# Altium PCB AC_Measure.PcbDoc
Units mil, origin at the board's own origin, x right, y up, seen from the top; angles counter-clockwise.
Board outline 4448.82 x 2165.35 mil, 2 copper layers (Top Layer, Bottom Layer); 52 components, 41 nets, 289 pads, 28 vias.
Unrouted connection lines stored in the file: 5.
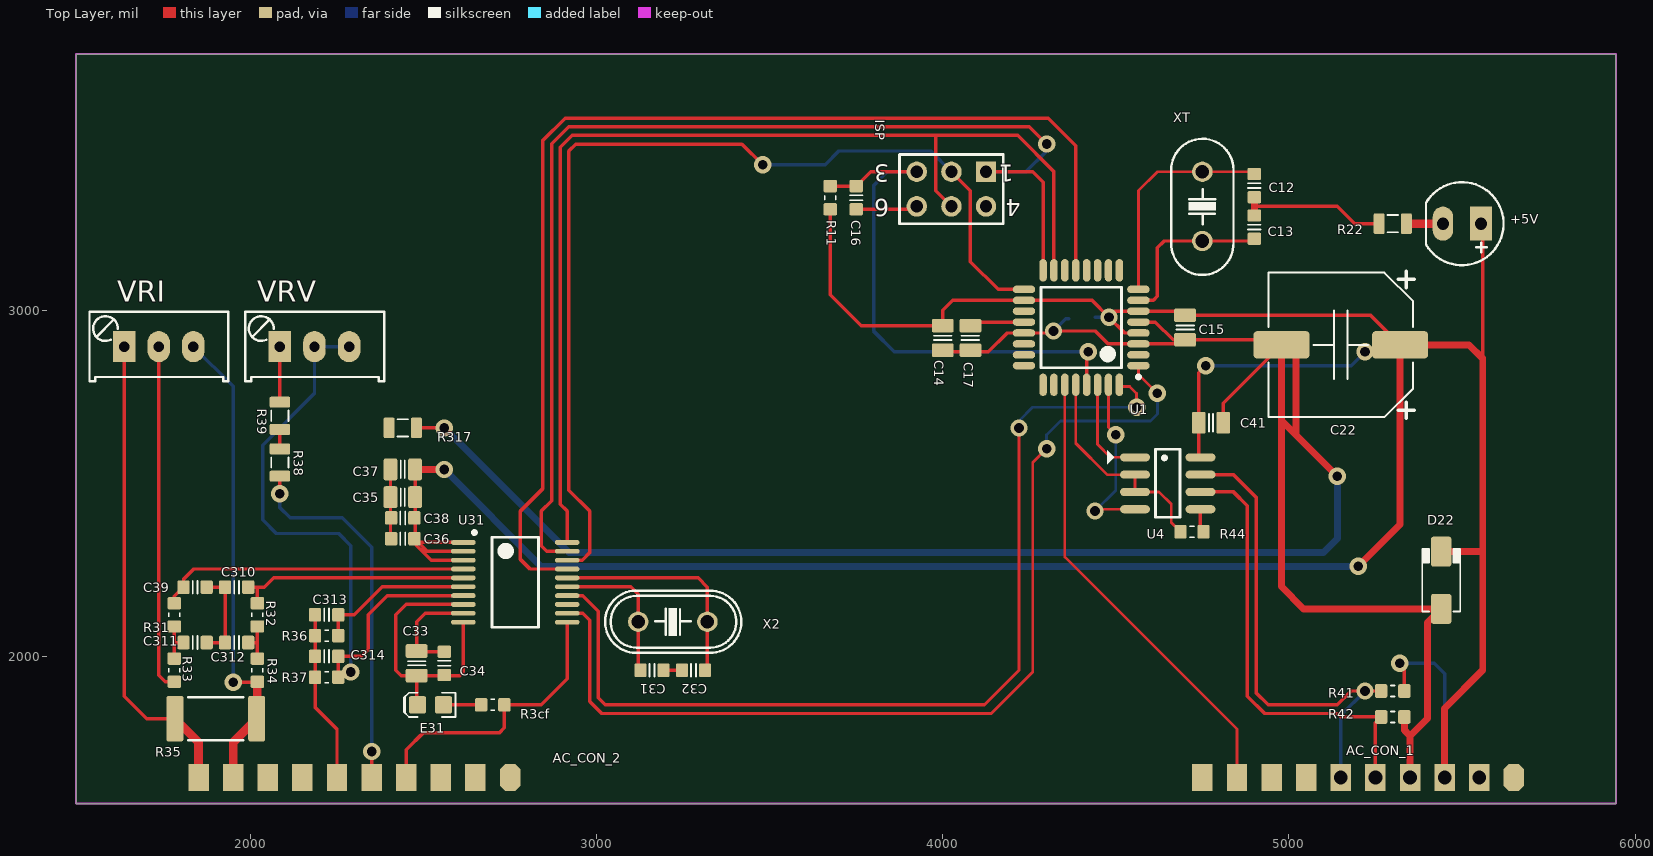
[diagram p0: Top Layer view]
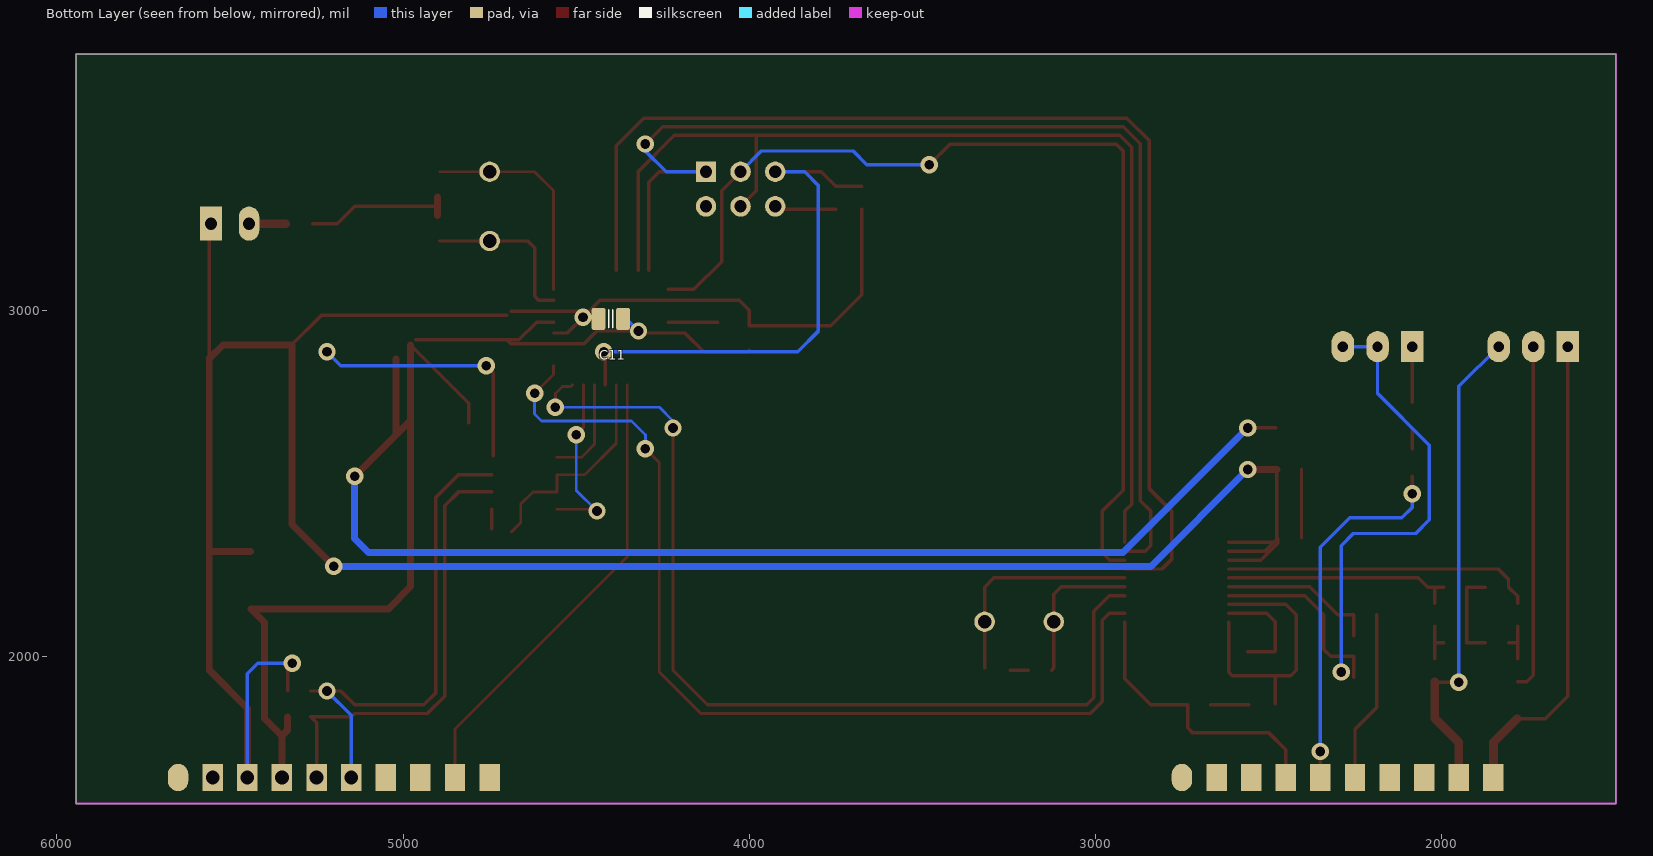
[diagram p1: Bottom Layer view, seen from below]
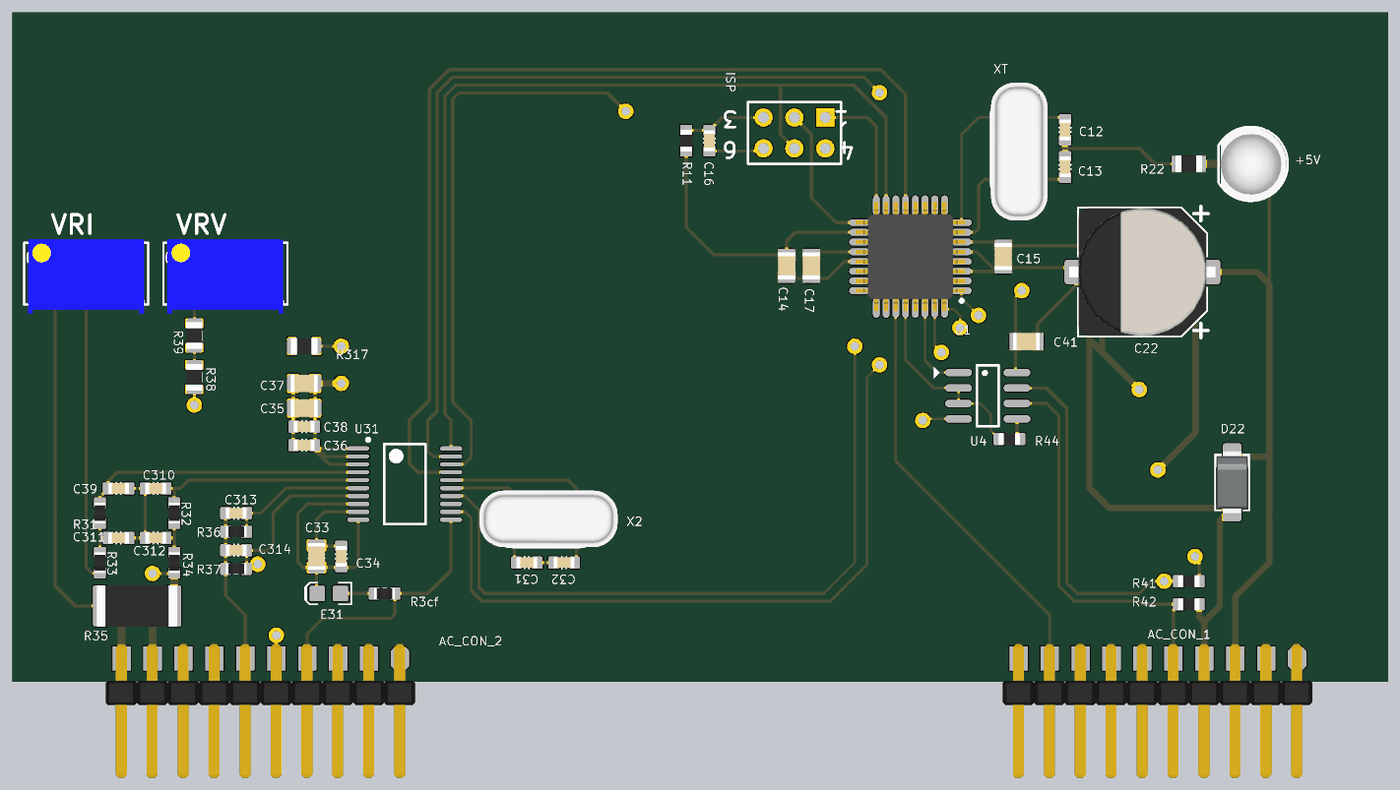
[diagram p2: 3D render of the assembled board from above, using the file's embedded part models]

## Layer stack, top to bottom
Top Solder: solder mask 0.4, Solder Resist, Dk 3.5
Top Layer: signal copper 1.4
Dielectric 1: dielectric 12.6, FR-4, Dk 4.8
Bottom Layer: signal copper 1.4
Bottom Solder: solder mask 0.4, Solder Resist, Dk 3.5

## Board outline
1496.06,1574.8 5944.88,1574.8 5944.88,3740.16 1496.06,3740.16

## Design rules (kind name [scope] priority, off if disabled: settings)
Clearance [All] p1: gap=10 except(8: Arc-SMDPad Track-SMDPad SMDPad-SMDPad; 20: Arc-Poly Track-Poly SMDPad-Poly THPad-Poly Via-Poly Fill-Poly Poly-Poly)
PlaneConnect [All] p1: planeconnectstyle=Direct reliefexpansion=20 reliefentries=4 reliefconductorwidth=10 reliefairgap=10
PolygonConnect [All] p1: connectstyle=Direct reliefconductorwidth=10 reliefentries=4 polygonreliefangle="90 Angle" airgapwidth=10
RoutingVias [All] p1: holewidth=31.5 width=47.24 viastyle="Through Hole" minholewidth=19.68 minwidth=43.31 maxholewidth=196.85 maxwidth=196.85
SolderMaskExpansion [All] p1: expansion=4
Width [All] p1: maxlimit=50 minlimit=8 preferedwidth=25
29 further rules are at their usual default settings.

## Components (designator, comment, footprint, x,y, rotation, side; value= is the part's Value field where it differs from the comment)
+5V "Led" "LED 5mm RED" 5500,3250 r180 top
AC_CON_1 "Header 10X2A" OMC10 5650,1650 r180 top
AC_CON_2 "Header 10X2A" OMC10 2750,1650 r180 top
C11 "Cap" CAPC2012N_F#1 4400,2975 r180 bottom
C12 "CAP NP" CAPC1608N 4900,3360 r270 top
C13 "CAP NP" CAPC1608N 4900,3240 r90 top
C14 "Cap" CAPC2012N_F#2 4000,2920 r270 top
C15 "Cap" CAPC2012N_F#2 4700,2950 r270 top
C16 "CAP NP" CAPC1608N 3750,3325 r90 top
C17 "Cap" CAPC2012N_F#2 4080,2920 r270 top
C22 "2200uF/35V" CAP_ELEC_SIZE_G 5150,2900 r90 top
C31 "CAP NP" CAPC1608N 3160,1960 r180 top
C32 "CAP NP" CAPC1608N 3280,1960 r0 top
C33 "Cap" CAPC2012N_F#3 2480,1980 r270 top
C34 "CAP NP" CAPC1608N 2560,1980 r90 top
C35 "Cap" CAPC2012N_F#3 2440,2460 r180 top
C36 "CAP NP" CAPC1608N 2440,2340 r0 top
C37 "Cap" CAPC2012N_F#3 2440,2540 r180 top
C38 "CAP NP" CAPC1608N 2440,2400 r0 top
C39 "CAP NP" CAPC1608N 1840,2200 r180 top
C41 "100nF/104" CAPC2012N_F#2 4775,2675 r180 top
C310 "CAP NP" CAPC1608N 1960,2200 r0 top
C311 "CAP NP" CAPC1608N 1840,2040 r180 top
C312 "CAP NP" CAPC1608N 1960,2040 r0 top
C313 "CAP NP" CAPC1608N 2220,2120 r0 top
C314 "CAP NP" CAPC1608N 2220,2000 r0 top
D22 "Diode" DO-214AC 5440,2220 r90 top
E31 "Blue" LED-0805-K 2520,1860 r180 top
ISP "Header 3X2A" HDR2X3_CEN 4125,3400 r180 top
R3cf "Res" 0603ESDA 2700,1860 r180 top
R11 "Res" RESC1608N_ZERO 3675,3325 r270 top
R22 "Res_0805_1k" RESC2012N_F#1 5300,3250 r180 top
R31 "Res" 0603ESDA 1780,2120 r90 top
R32 "Res" 0603ESDA 2020,2120 r90 top
R33 "Res" 0603ESDA 1780,1960 r90 top
R34 "Res" 0603ESDA 2020,1960 r90 top
R35 "0.002R" RESC6332N 1900,1820 r180 top
R36 "Res" 0603ESDA 2220,2060 r0 top
R37 "Res" 0603ESDA 2220,1940 r0 top
R38 "Res" RESC2012N_F#2 2085,2560 r90 top
R39 "Res" RESC2012N_F#2 2085,2695 r90 top
R41 "1k" RESC1608N_ZERO 5300,1900 r0 top
R42 "1k" RESC1608N_ZERO 5300,1825 r180 top
R44 "330R" RESC1608N_ZERO 4720,2360 r180 top
R317 "Res" RESC2012N_F#2 2440,2660 r180 top
U1 "ATmega88PA" 32PIN 4400,2950 r180 top
U4 "MAX485" SO-8 4650,2500 r0 top
U31 "ADE7753" TSSOP-20 2765,2214 r0 top
VRI "1K" VR1 1635,2895 r0 top
VRV "100K" VR1 2085,2895 r0 top
X2 "3.5795Mhz" XT2 3220,2100 r180 top
XT "16MHz" XT2 4750,3300 r90 top

## Footprints (in the part's own frame and the unit in brackets; to place one, negate y for a bottom-side part, rotate by r counter-clockwise, add the part's x,y. Pads: shape width x height; smd on the part's side, far side on the other; paste and mask are expansions set on the pad)
32PIN [mm]
  oval 1.65x0.55 smd: 1(-4.2,2.8) 2(-4.2,2) 3(-4.2,1.2) 4(-4.2,0.4) 5(-4.2,-0.4) 6(-4.2,-1.2) 7(-4.2,-2) 8(-4.2,-2.8) 17(4.2,-2.8) 18(4.2,-2) 19(4.2,-1.2) 20(4.2,-0.4) 21(4.2,0.4) 22(4.2,1.2) 23(4.2,2) 24(4.2,2.8)
  oval 0.55x1.65 smd: 9(-2.8,-4.2) 10(-2,-4.2) 11(-1.2,-4.2) 12(-0.4,-4.2) 13(0.4,-4.2) 14(1.2,-4.2) 15(2,-4.2) 16(2.8,-4.2) 25(2.8,4.2) 26(2,4.2) 27(1.2,4.2) 28(0.4,4.2) 29(-0.4,4.2) 30(-1.2,4.2) 31(-2,4.2) 32(-2.8,4.2)
  silkscreen extent -4.33,-2.95 2.95,3.75, body extent -4.5,-4.5 4.5,4.5, height 1.6
0603ESDA [mm] "Chip ESD suppressor, Body 1.6x0.8mm, 0603, IPC Medium Density"
  round 0.254 on Mech14: 0(0,0)
  rrect25% 0.9x1 smd: 1(-0.85,0) 2(0.85,0)
  Top Layer pour cut-out: -0.4,0.6 0.4,0.6 0.4,-0.6 -0.4,-0.6
  silkscreen extent -0.15,-0.41 0.15,0.41, body extent -0.85,-0.45 0.85,0.45, height 0.79
CAP_ELEC_SIZE_G [mm] "Capacitor, polarized, aluminum can; 10.0x10.2mm DxH"
  round 0.635 on Mech14: 0(0,0)
  rrect25% 2x4.1 smd: 1(0,-4.35) 2(0,4.35)
  silkscreen extent -5.4,-5.4 5.4,5.3, body extent -5.25,-6 5.25,6, height 10.5
CAPC1608N [mm] "Chip Capacitor, Body 1.6x0.8mm, 0603, IPC Medium Density"
  round 0.254 on Mech14: 0(0,0)
  rrect25% 0.9x1 smd: 1(-0.85,0) 2(0.85,0)
  Top Layer pour cut-out: -0.4,0.6 0.4,0.6 0.4,-0.6 -0.4,-0.6
  silkscreen extent -0.18,-0.48 0.18,0.48, body extent -0.85,-0.45 0.85,0.45, height 0.89
CAPC2012N_F#1 [mm] "Chip Capacitor, Body 2.0x1.2mm, 0805, IPC Medium Density, for Flex circuits"
  round 0.254 on Mech14: 0(0,0)
  rrect25% 1.2x1.4 on Bottom Solder: 1(-0.9,0) 1(0.9,0)
  rrect25% 1x1.6 smd paste-1: 1(-0.9,0) 2(0.9,0)
  rrect25% 1x1.4 on Bottom Paste: 1(-0.9,0) 1(0.9,0)
  Top Layer pour cut-out: -0.4,0.8 0.4,0.8 0.4,-0.8 -0.4,-0.8
  silkscreen extent -0.15,-0.65 0.15,0.65, body extent -1.1,-0.72 1.1,0.73, height 1.34
CAPC2012N_F#2 [mm] "Chip Capacitor, Body 2.0x1.2mm, 0805, IPC Medium Density, for Flex circuits"
  round 0.254 on Mech14: 0(0,0)
  rrect25% 1.2x1.4 on Top Solder: 1(-0.9,0) 1(0.9,0)
  rrect25% 1x1.6 smd paste-1: 1(-0.9,0) 2(0.9,0)
  rrect25% 1x1.4 on Top Paste: 1(-0.9,0) 1(0.9,0)
  Top Layer pour cut-out: -0.4,0.8 0.4,0.8 0.4,-0.8 -0.4,-0.8
  silkscreen extent -0.15,-0.65 0.15,0.65, body extent -1.1,-0.72 1.1,0.73, height 1.34
CAPC2012N_F#3 [mm] "Chip Capacitor, Body 2.0x1.2mm, 0805, IPC Medium Density, for Flex circuits"
  round 0.254 on Mech14: 0(0,0)
  rrect50% 1.2x1.4 on Top Solder: 1(-0.9,0) 1(0.9,0)
  rrect25% 1x1.6 smd paste-1: 1(-0.9,0) 2(0.9,0)
  rrect50% 1x1.4 on Top Paste: 1(-0.9,0) 1(0.9,0)
  Top Layer pour cut-out: -0.4,0.8 0.4,0.8 0.4,-0.8 -0.4,-0.8
  silkscreen extent -0.15,-0.65 0.15,0.65, body extent -1.1,-0.72 1.1,0.73, height 1.34
DO-214AC [mm] "JEDEC DO214 variation AC. SMA"
  round 0.508 on Mech14: 0(0,0)
  rrect25% 2.2x1.5 smd: A(-2.1,0) K(2.1,0)
  silkscreen extent -2.3,-1.4 2.3,1.4, body extent -2.6,-1.3 2.6,1.3, height 2.42
HDR2X3_CEN [mm] "Connector; Header; 3x2 Position"
  rect 1.5x1.5 hole 0.9: 1(0,0)
  round 1.5 hole 0.9: 2(2.54,0) 3(5.08,0) 4(0,2.54) 5(2.54,2.54) 6(5.08,2.54)
  silkscreen extent -1.27,-1.27 6.35,3.81
"LED 5mm RED" [mm]
  rect 1.6x2.5 hole 0.9: A(-1.397,0)
  oval 1.5x2.5 hole 0.9: K(1.397,0)
  silkscreen extent -3.04,-3.05 2.64,3.04, body extent -2.94,-2.97 2.48,3.05, height 12.31
LED-0805-K [mil]
  round 20 on Mech14: 0(0,0)
  rrect25% 50x50 smd: A(-37.5,0) K(37.5,0)
  Top Layer pour cut-out: -15,30 15,30 15,-30 -15,-30
  silkscreen extent -72,-35 77,35, body extent -39,-25 39,25, height 31
OMC10 [mm]
  oct 1.5x2 smd: 1(0,0)
  rect 1.5x2 smd: 2(2.54,0) 3(5.08,0) 4(7.62,0) 5(10.16,0) 6(12.7,0) 7(15.24,0) 8(17.78,0) 9(20.32,0) 10(22.86,0)
  oval 1.5x2 smd far side: 11(0,0)
  rect 1.5x2 smd far side: 12(2.54,0) 13(5.08,0) 14(7.62,0) 15(10.16,0) 16(12.7,0) 17(15.24,0) 18(17.78,0) 19(20.32,0) 20(22.86,0)
  body extent -1.24,-1.18 24.16,9.82, height 2.33
RESC1608N_ZERO [mm] "Chip Resistor, Body 1.6x0.8mm, 0603, IPC Medium Density"
  round 0.254 on Mech14: 0(0,0)
  rrect25% 0.9x1 smd: 1(-0.85,0) 2(0.85,0)
  Top Layer pour cut-out: -0.4,0.6 0.4,0.6 0.4,-0.6 -0.4,-0.6
  silkscreen extent -0.15,-0.41 0.15,0.41, body extent -0.87,-0.47 0.88,0.48, height 0.54
RESC2012N_F#1 [mm] "Chip Resistor, Body 2.0x1.2mm, 0805, IPC Medium Density"
  round 0.254 on Mech14: 0(0,0)
  rrect25% 1x1.3 on Top Solder: 1(-1,0) 1(1,0)
  rrect25% 0.8x1.5 smd paste-1: 1(-1,0) 2(1,0)
  rrect25% 0.8x1.3 on Top Paste: 1(-1,0) 1(1,0)
  Top Layer pour cut-out: -0.6,0.75 0.6,0.75 0.6,-0.75 -0.6,-0.75
  silkscreen extent -0.38,-0.64 0.38,0.64, body extent -1.1,-0.67 1.1,0.68, height 0.69
RESC2012N_F#2 [mm] "Chip Resistor, Body 2.0x1.2mm, 0805, IPC Medium Density"
  round 0.254 on Mech14: 0(0,0)
  rrect50% 1x1.3 on Top Solder: 1(-1,0) 1(1,0)
  rrect25% 0.8x1.5 smd paste-1: 1(-1,0) 2(1,0)
  rrect50% 0.8x1.3 on Top Paste: 1(-1,0) 1(1,0)
  Top Layer pour cut-out: -0.6,0.75 0.6,0.75 0.6,-0.75 -0.6,-0.75
  silkscreen extent -0.38,-0.64 0.38,0.64, body extent -1.1,-0.67 1.1,0.68, height 0.69
RESC6332N [mm] "Chip Resistor, Body 6.3x3.2mm, 2512, IPC Medium Density"
  round 1 on Mech14: 0(0,0)
  rrect25% 1.25x3.35 smd: 1(-3,0) 2(3,0)
  silkscreen extent -2,-1.58 2,1.58, body extent -3.3,-1.7 3.3,1.7, height 0.69
SO-8 [mm] "8-Pin Small Outline Integrated Circuit 1.27 mm Pitch, IPC Medium Density"
  oval 2.2x0.6 smd: 1(-2.4,1.905) 2(-2.4,0.635) 3(-2.4,-0.635) 4(-2.4,-1.905) 5(2.4,-1.905) 6(2.4,-0.635) 7(2.4,0.635) 8(2.4,1.905)
  silkscreen extent -4.44,-2.5 0.9,2.5, body extent -1.95,-2.45 1.95,2.45, height 1.75
TSSOP-20 [mm] "TSOP, 20-Leads, Body 6.5x4.4mm, Pitch 0.65mm, IPC Low Density"
  oval 1.8x0.35 smd: 1(-3.81,2.925) 2(-3.81,2.275) 3(-3.81,1.625) 4(-3.81,0.975) 5(-3.81,0.325) 6(-3.81,-0.325) 7(-3.81,-0.975) 8(-3.81,-1.625) 9(-3.81,-2.275) 10(-3.81,-2.925) 11(3.81,-2.925) 12(3.81,-2.275) 13(3.81,-1.625) 14(3.81,-0.975) 15(3.81,-0.325) 16(3.81,0.325) 17(3.81,0.975) 18(3.81,1.625) 19(3.81,2.275) 20(3.81,2.925)
  silkscreen extent -3.12,-3.3 1.7,3.77, body extent -2.25,-3.3 2.25,3.3, height 1.2
VR1 [mil] "Variable Resistor"
  rect 65x90 hole 30: 1(0,0)
  oval 65x90 hole 30: 2(100,0) 3(200,0)
  silkscreen extent -100,-100 301,100, body extent -88,-130 288,110, height 455
XT2 [mm] "Footpin for Crystal 2 pin"
  round 1.5 hole 1: 1(-2.54,0) 2(2.54,0)
  silkscreen extent -5.03,-2.29 4.96,2.29, body extent -5.93,-2.36 5.42,2.29, height 3.5

## Part data
AC_CON_1 AC_CON_2: "Header, 10-Pin, Dual row"
C22: library part CP4, "Cap 1000uF/16V - 220uF/50V"
C41: library part "CAP NP"
E31: library part LED_SMD_Blue_0805_100mcd, "LED 0805 SMD Blue 100mcd 470nm"
ISP: "Header, 3-Pin, Dual row"
R22: library part Res
R35: library part R, "Resistor 1/4W"
R41 R42 R44: library part Res, "Tro dan"
U1: library part ATmega48/168/328, "ATmega48/168/328"
U4: "RS232 - RS485 (Same sn75176)"
U31: "Single-Phase Multifunction Metering IC with di/dt Sensor Interface"
VRI VRV: library part VR, "Var Resistor"
X2: library part XT2, "Crystal For all Crystal 2pin."
XT: library part Crystal

## Via types
v1: diameter 50, hole 28, Top Layer to Bottom Layer, 23 vias
v2: diameter 59.06, hole 39.37, Top Layer to Bottom Layer, 5 vias

## Nets (pads, with @x,y where several pads share a name; then routed paths per layer and width w, separated by ;. In a path a pad name is that pad's centre, name@x,y a point inside that pad or via, vN(x,y) a via of type N, cw(c..) or ccw(c..) an arc to the next point about the centre after c; other vN are vias at no path point)
+3V3: AC_CON_1.7 AC_CON_1.17
+5V: +5V.A AC_CON_1.3 AC_CON_1.13 C11.1@4435.43,2975 C14.1@4000,2955.43 C15.1@4700,2985.43 C22.1 C35.1@2475.43,2460 C36.2 C37.1@2475.43,2540 C38.2 C41.2 D22.K R11.2 R41.2 U1.4 U1.6 U1.18 U4.8 U31.1 U31.2 U31.3 | length 9665.8
  Top Layer w10: C36.2@2475.43,2341.97 2475.43,2460 C37.1@2475.43,2540 ; U31.3 2522.02,2277.98 2473.46,2326.54 C36.2 C36.2@2484.31,2329.16 ; U31.2 2509.9,2303.57 C36.2@2484.31,2329.16 ; U31.1 C36.2@2484.31,2329.16 ; R11.2 3675,3045 3764.57,2955.43 4000,2955.43 4000,3000 4028.74,3028.74 U1.18 4431.26,3028.74 v1(4480,2980) ; U1.4 4525.75,2934.25 v1(4480,2980) ; C15.1@4688.19,2997.24 U1.6 4497.24,2997.24 v1(4480,2980) ; C15.1@4700,2985.43 5235.83,2985.43 C22.1 ; U4.8@4739.57,2579.92 C41.2 4739.57,2819.57 v1(4760,2840) ; v1(5320,1980) 5333.46,1966.54 R41.2 ; +5V.A 5560,3245 5560,2860
  Top Layer w20: C37.1@2475.43,2540 v1(2560,2540) ; v1(5200,2260) 5321.26,2381.26 C22.1 5520,2900 5560,2860 5560,1960 5450,1850 v2(5450,1650) ; D22.K 5557.32,2302.68
  Bottom Layer w10: C11.1@4440.43,2980 v1(4480,2980) ; v1(4760,2840) 5180,2840 v1(5220,2880) ; v1(5320,1980) 5420,1980 5450,1950 v2(5450,1650)
  Bottom Layer w20: v1(2560,2540) 2840,2260 v1(5200,2260)
+12V_IN: AC_CON_1.1 AC_CON_1.11
ADC6: U1.19
ADC7: U1.22
ADE-CLK: ISP.2 U1.17 U31.18 | length 2909
  Top Layer w10: U31.18 2957.98,2277.98 2980,2300 2980,2420 2920,2480 2920,3460 2940,3480 3420,3480 v1(3480,3420) ; ISP.2 4080,3345 4080,3140 4159.76,3060.24 U1.17
  Bottom Layer w10: v1(3480,3420) 3660,3420 3700,3460 3965,3460 ISP.2
ADE-CS: U1.13 U31.17 | length 3343.4
  Top Layer w10: U31.17 2807.61,2252.39 2780,2280 2780,2420 2845,2485 2845,3491.07 2908.93,3555 4305,3555 4384.25,3475.75 U1.13
ADE-DIN: ISP.5 U1.15 U31.20 | length 3141.9
  Top Layer w10: U31.20 2915,2420 2895,2440 2895,3470.36 2929.64,3505 3980,3505 ; ISP.5 3980,3345 3980,3505 ; U1.15 4321.26,3400 4216.26,3505 3980,3505
ADE-DOUT: ISP.1 U1.16 U31.19 | length 3377.9
  Top Layer w10: U31.19 2856.43,2303.57 2840,2320 2840,2420 2870,2450 2870,3480.71 2919.29,3530 4250,3530 v1(4300,3480) ; ISP.1 4260,3400 4289.76,3370.24 U1.16
  Bottom Layer w10: ISP.1 4240,3400 4300,3460 v1(4300,3480)
ADE_IRQ: U1.32 U31.14 | length 2800.5
  Top Layer w8: 4120,1860 4220,1960 v1(4220,2660) ; U1.32 4514.88,2780 4540,2780 4560,2760 v1(4560,2720)
  Top Layer w10: U31.14 2960,2175.61 3005,2130.61 3005,1880 3025,1860 4120,1860
  Bottom Layer w8: v1(4220,2660) 4220,2680 4260,2720 v1(4560,2720)
AGND: AC_CON_2.6 C31.1 C32.1 C33.2 C34.1 C35.2 C36.1 C37.2 C38.1 C39.1 C310.1 C311.1 C312.1 C313.1 C314.1 E31.K R36.1 R37.1 R317.2 U31.8 U31.10 | length 1812.6
  Top Layer w10: C311.1 C312.1 C310.1 C39.1 ; C313.1 R36.1 C314.1 R37.1 2186.54,1853.46 2250,1790 AC_CON_2.6 ; C36.1@2404.57,2341.97 C35.2 C37.2 ; E31.K@2480,1862.5 C33.2 ; U31.10 2615,1955 2604.57,1944.57 C33.2 ; U31.8 2450.02,2150.02 2420,2120 2420,1960 2435.43,1944.57 C33.2 ; C31.1 C32.1
AREF: C17.1@4080,2955.43 U1.20 | length 144.3
  Top Layer w10: C17.1@4090.31,2965.75 U1.20
CF: AC_CON_2.4 R3cf.1 U31.11 | length 832.7
  Top Layer w10: AC_CON_2.4 2450,1730 2500,1780 2720,1780 2733.46,1793.46 R3cf.1 2840,1860 2915,1935 U31.11
CTA: AC_CON_2.10 R35.2 VRI.1 | length 1382
  Top Layer w10: VRI.1 1635,1885 1700,1820 R35.2
  Top Layer w25: R35.2 1850,1751.89 AC_CON_2.10
CTB: AC_CON_2.9 R34.1 R35.1 VRI.3 | length 1391.1
  Top Layer w10: v1(1950,1925) 2018.46,1925 R34.1
  Top Layer w25: AC_CON_2.9 1950,1751.89 R35.1 ; R35.1@2020,1821.89 R34.1
  Bottom Layer w10: VRI.3 1950,2780 v1(1950,1925)
GND: AC_CON_1.2 AC_CON_1.4 AC_CON_1.12 AC_CON_1.14 C11.2 C12.2 C13.2 C14.2 C15.2 C16.1 C17.2 C22.2 C41.1@4810.43,2675 D22.A ISP.6 R22.2 R42.1 R44.1 R317.1@2479.37,2660 U1.3 U1.5 U1.21 U4.5 | length 7415.8
  Top Layer w10: R317.1@2479.37,2660 v1(2560,2660) ; C16.1 3916.54,3291.54 ISP.6 ; C14.2 4004.57,2880 4131.5,2880 4185.75,2934.25 U1.21 4314.25,2934.25 v1(4320,2940) 4440,2940 4477.24,2902.76 U1.3 4688.19,2902.76 C15.2 ; U1.5 4614.25,2965.75 4665.43,2914.57 C15.2 ; R44.1@4744.49,2368.98 U4.5 ; C41.1@4810.43,2675 4810.43,2731.69 C22.2 ; 4900,3300 5140,3300 5190,3250 R22.2 ; C22.2@4964.17,2914.57 C15.2
  Top Layer w20: C13.2 4900,3300 C12.2 ; C22.2 4978.74,2681.26 ; 5020,2858.74 5020,2640 ; v1(5140,2520) 5020,2640 ; R42.1 5333.46,1786.54 5350,1770 ; v2(5350,1650) 5350,1770 ; 4978.74,2681.26 4978.74,2201.26 5042.68,2137.32 D22.A 5400,2097.32 5400,1820 5350,1770 ; 4978.74,2681.26 5020,2640
  Bottom Layer w10: v1(4320,2940) 4355,2975 C11.2
  Bottom Layer w20: v1(2560,2660) 2920,2300 5100,2300 5140,2340 v1(5140,2520)
  other v2: 5550,1650
I1N: C312.2 R32.1 R34.2 | length 119.6
  Top Layer w10: C312.2 2020,2040 ; R34.2 R32.1
IDC: AC_CON_1.9 AC_CON_1.19 U1.27 | length 1340.6
  Top Layer w8: U1.27 4352.76,2287.24 4850,1790 AC_CON_1.9
LIVE_IN: AC_CON_2.5 R38.1@2085,2520.63 | length 1082.4
  Top Layer w10: v1(2085,2470) R38.1@2085,2520.63 ; AC_CON_2.5@2340,1660 AC_CON_2.5 v1(2350,1725)
  Bottom Layer w10: v1(2085,2470) 2085,2430 2115,2400 2265,2400 2350,2315 v1(2350,1725)
MCU_RX: U1.30 U4.1 | length 295.8
  Top Layer w8: U1.30 4447.24,2612.76 4485,2575 U4.1
MCU_TX: U1.31 U4.4 | length 515.9
  Top Layer w8: v1(4440,2420) 4445,2425 U4.4 ; U1.31 4478.74,2661.26 v1(4500,2640)
  Bottom Layer w8: v1(4440,2420) 4500,2480 v1(4500,2640)
Net+5V_2: +5V.K R22.1@5339.37,3250 | length 105.6
  Top Layer w25: R22.1@5339.37,3250 +5V.K
NetC31_2: C31.2 U31.15 X2.2 | length 436.5
  Top Layer w10: U31.15 3098.8,2201.2 3120,2180 X2.2 3120,1966.54 C31.2
NetC32_2: C32.2 U31.16 X2.1 | length 649.6
  Top Layer w10: U31.16 3293.2,2226.8 3320,2200 X2.1 C32.2@3320,1966.54
NetC311_2: C311.2 R31.1 R33.2 | length 119.6
  Top Layer w10: R33.2 R31.1 ; 1780,2040 C311.2
NetE31_A: E31.A R3cf.2 | length 109
  Top Layer w10: E31.A R3cf.2
NetR33_1: R33.1 VRI.2 | length 1002.6
  Top Layer w10: VRI.2 1735,1945 1753.46,1926.54 R33.1
NetR38_2: R38.2 R39.1@2085,2655.63 | length 56.3
  Top Layer w10: R38.2 R39.1@2085,2655.63
NetR39_2: R39.2 VRV.1 | length 160.6
  Top Layer w10: R39.2 VRV.1
REF: C33.1@2480,2015.43 C34.2 U31.9 | length 307.7
  Top Layer w10: C33.1@2480,2015.43 2480,2100 2504.43,2124.43 U31.9 ; C33.1@2481.97,2013.46 C34.2
RESET: C16.2 ISP.3 R11.1 U1.29 | length 1570.7
  Top Layer w10: R11.1 C16.2 3791.54,3400 ISP.3 ; U1.29 4415.75,2875.75 v1(4420,2880)
  Bottom Layer w10: ISP.3 3840,3400 3800,3360 3800,2940 3860,2880 v1(4420,2880)
RS485A: AC_CON_1.5 AC_CON_1.15 R42.2 U4.6 | length 1295.5
  Top Layer w10: U4.6 4840,2475 4880,2435 4880,1884.64 4929.64,1835 5140,1835 5150,1825 R42.2 5250,1808.46 v2(5250,1650)
RS485B: AC_CON_1.6 AC_CON_1.16 R41.1 U4.7 | length 1424
  Top Layer w10: U4.7 4840,2525 4905,2460 4905,1895 4940,1860 5140,1860 5180,1900 v1(5220,1900) R41.1
  Bottom Layer w10: v2(5150,1650) 5150,1830 v1(5220,1900)
RS485D: R44.2 U1.28 U4.2 U4.3 | length 637.7
  Top Layer w8: U1.28 4384.25,2615.75 4475,2525 U4.2 U4.3 4625,2475 4660,2440 4660,2386.54 R44.2
V1N: C310.2 R32.2 U31.5 | length 679.2
  Top Layer w10: C310.2 2020,2200 ; R32.2 2020,2200 ; U31.5 2066.8,2226.8 2040,2200 2020,2200
V1P: C39.2 R31.2 U31.4 | length 901.3
  Top Layer w10: R31.2 1780,2173.46 C39.2 1806.54,2223.27 1835.65,2252.39 U31.4
V2N: C313.2 R36.2 U31.6 | length 455.2
  Top Layer w10: R36.2 C313.2 2300,2120 2381.2,2201.2 U31.6
V2P: C314.2 R37.2 U31.7 VRV.2 VRV.3 | length 1866.1
  Top Layer w10: R37.2 C314.2 2320,2000 2340,2020 2340,2120 2395.61,2175.61 U31.7
  Bottom Layer w10: VRV.3 VRV.2 2185,2760 2035,2610 2035,2395 2075,2355 2255,2355 2290,2320 v1(2290,1955)
XTAL1: C12.1 U1.8 XT.2 | length 635.9
  Top Layer w8: U1.8 4565.35,3345.35 4620,3400 XT.2 C12.1@4893.46,3400
XTAL2: C13.1 U1.7 XT.1 | length 481.1
  Top Layer w10: U1.7 4608.74,3028.74 4620,3040 4620,3180 4640,3200 XT.1 C13.1@4893.46,3200
"ZERO CROSSING": U1.1 U31.12 | length 2860.9
  Top Layer w8: 4140,1835 4260,1955 4260,2560 v1(4300,2600) ; U1.1 4565.35,2814.65 v1(4620,2760)
  Top Layer w10: U31.12 2960,2124.43 2980,2104.43 2980,1869.64 3014.64,1835 4140,1835
  Bottom Layer w8: v1(4300,2600) 4300,2640 4340,2680 4600,2680 4620,2700 v1(4620,2760)
pads on no net: AC_CON_1.8 AC_CON_1.10 AC_CON_1.18 AC_CON_1.20 AC_CON_2.1 AC_CON_2.2 AC_CON_2.3 AC_CON_2.7 AC_CON_2.8 AC_CON_2.11 AC_CON_2.12 AC_CON_2.13 AC_CON_2.14 AC_CON_2.15 AC_CON_2.16 AC_CON_2.17 AC_CON_2.18 AC_CON_2.19 AC_CON_2.20 C11.0 C11.1@4364.57,2974.99 C11.1@4364.57,2975 C11.1@4435.43,2975 C11.1@4435.44,2974.99 C12.0 C13.0 C14.0 C14.1@3999.99,2884.57 C14.1@3999.99,2955.44 C14.1@4000,2884.57 C14.1@4000,2955.43 C15.0 C15.1@4699.99,2914.57 C15.1@4699.99,2985.44 C15.1@4700,2914.57 C15.1@4700,2985.43 C16.0 C17.0 C17.1@4079.99,2884.57 C17.1@4079.99,2955.44 C17.1@4080,2884.57 C17.1@4080,2955.43 C22.0 C31.0 C32.0 C33.0 C33.1@2479.99,1944.57 C33.1@2479.99,2015.44 C33.1@2480,1944.57 C33.1@2480,2015.43 C34.0 C35.0 C35.1@2404.57,2460 C35.1@2404.57,2460.01 C35.1@2475.43,2460 C35.1@2475.44,2460.01 C36.0 C37.0 C37.1@2404.57,2540 C37.1@2404.57,2540.01 C37.1@2475.43,2540 C37.1@2475.44,2540.01 C38.0 C39.0 C41.0 C41.1@4739.57,2675 C41.1@4739.57,2675.01 C41.1@4810.43,2675 C41.1@4810.44,2675.01 C310.0 C311.0 C312.0 C313.0 C314.0 D22.0 E31.0 ISP.4 R3cf.0 R11.0 R22.0 R22.1@5260.63,3250 R22.1@5260.63,3250.01 R22.1@5339.37,3250 R22.1@5339.37,3250.01 R31.0 R32.0 R33.0 R34.0 R35.0 R36.0 R37.0 R38.0 R38.1@2085,2520.63 R38.1@2085,2599.37 R38.1@2085.01,2520.63 R38.1@2085.01,2599.37 R39.0 R39.1@2085,2655.63 R39.1@2085,2734.37 R39.1@2085.01,2655.63 R39.1@2085.01,2734.37 R41.0 R42.0 R44.0 R317.0 R317.1@2400.63,2660 R317.1@2400.63,2660.01 R317.1@2479.37,2660 R317.1@2479.37,2660.01 U1.2 U1.9 U1.10 U1.11 U1.12 U1.14 U1.23 U1.24 U1.25 U1.26 U31.13

## Keep-outs
Keep-Out Layer:
  the board outline again, w5.91

## Dimensions
1496.06,1220.47 to 5944.88,1259.84 on Top Overlay
1377.95,3740.16 to 1338.58,1574.8 on Top Overlay

## Text inside footprints (layer, text, board x,y; h text height)
ISP: Top Overlay "4" at 4225,3320 h50 r180; Top Overlay "1" at 4205,3420 h50 r180; Top Overlay "3" at 3845,3420 h50 r180; Top Overlay "6" at 3845,3320 h50 r180